# Altium PCB Copy of SafetyLightBoard.PcbDoc
Units mil, origin at the board's own origin, x right, y up, seen from the top; angles counter-clockwise.
Board outline 3600 x 3090 mil, 2 copper layers (Top Layer, Bottom Layer); 31 components, 27 nets, 118 pads, 20 vias.
Unrouted connection lines stored in the file: 2.
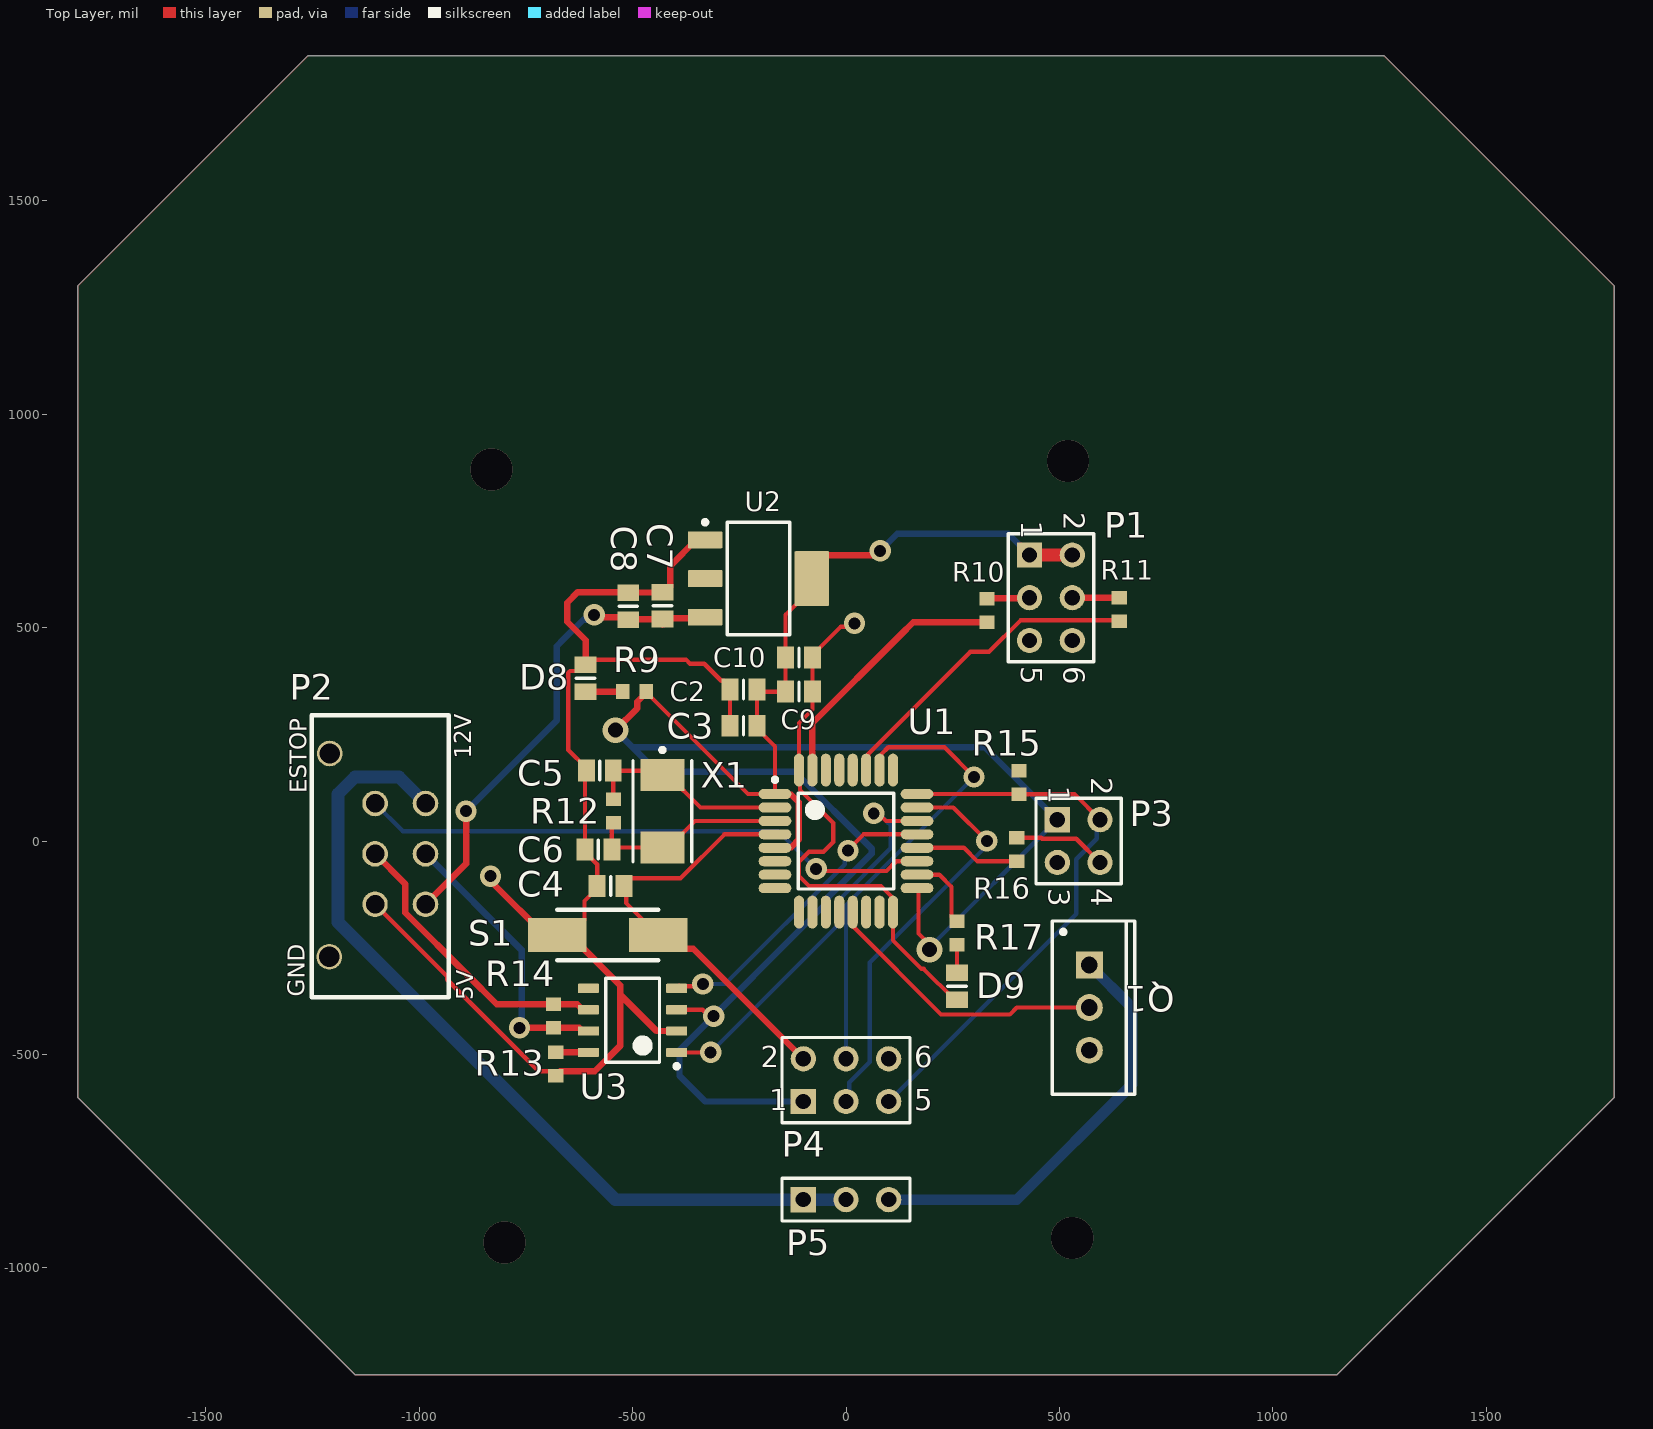
[diagram p0: Top Layer view]
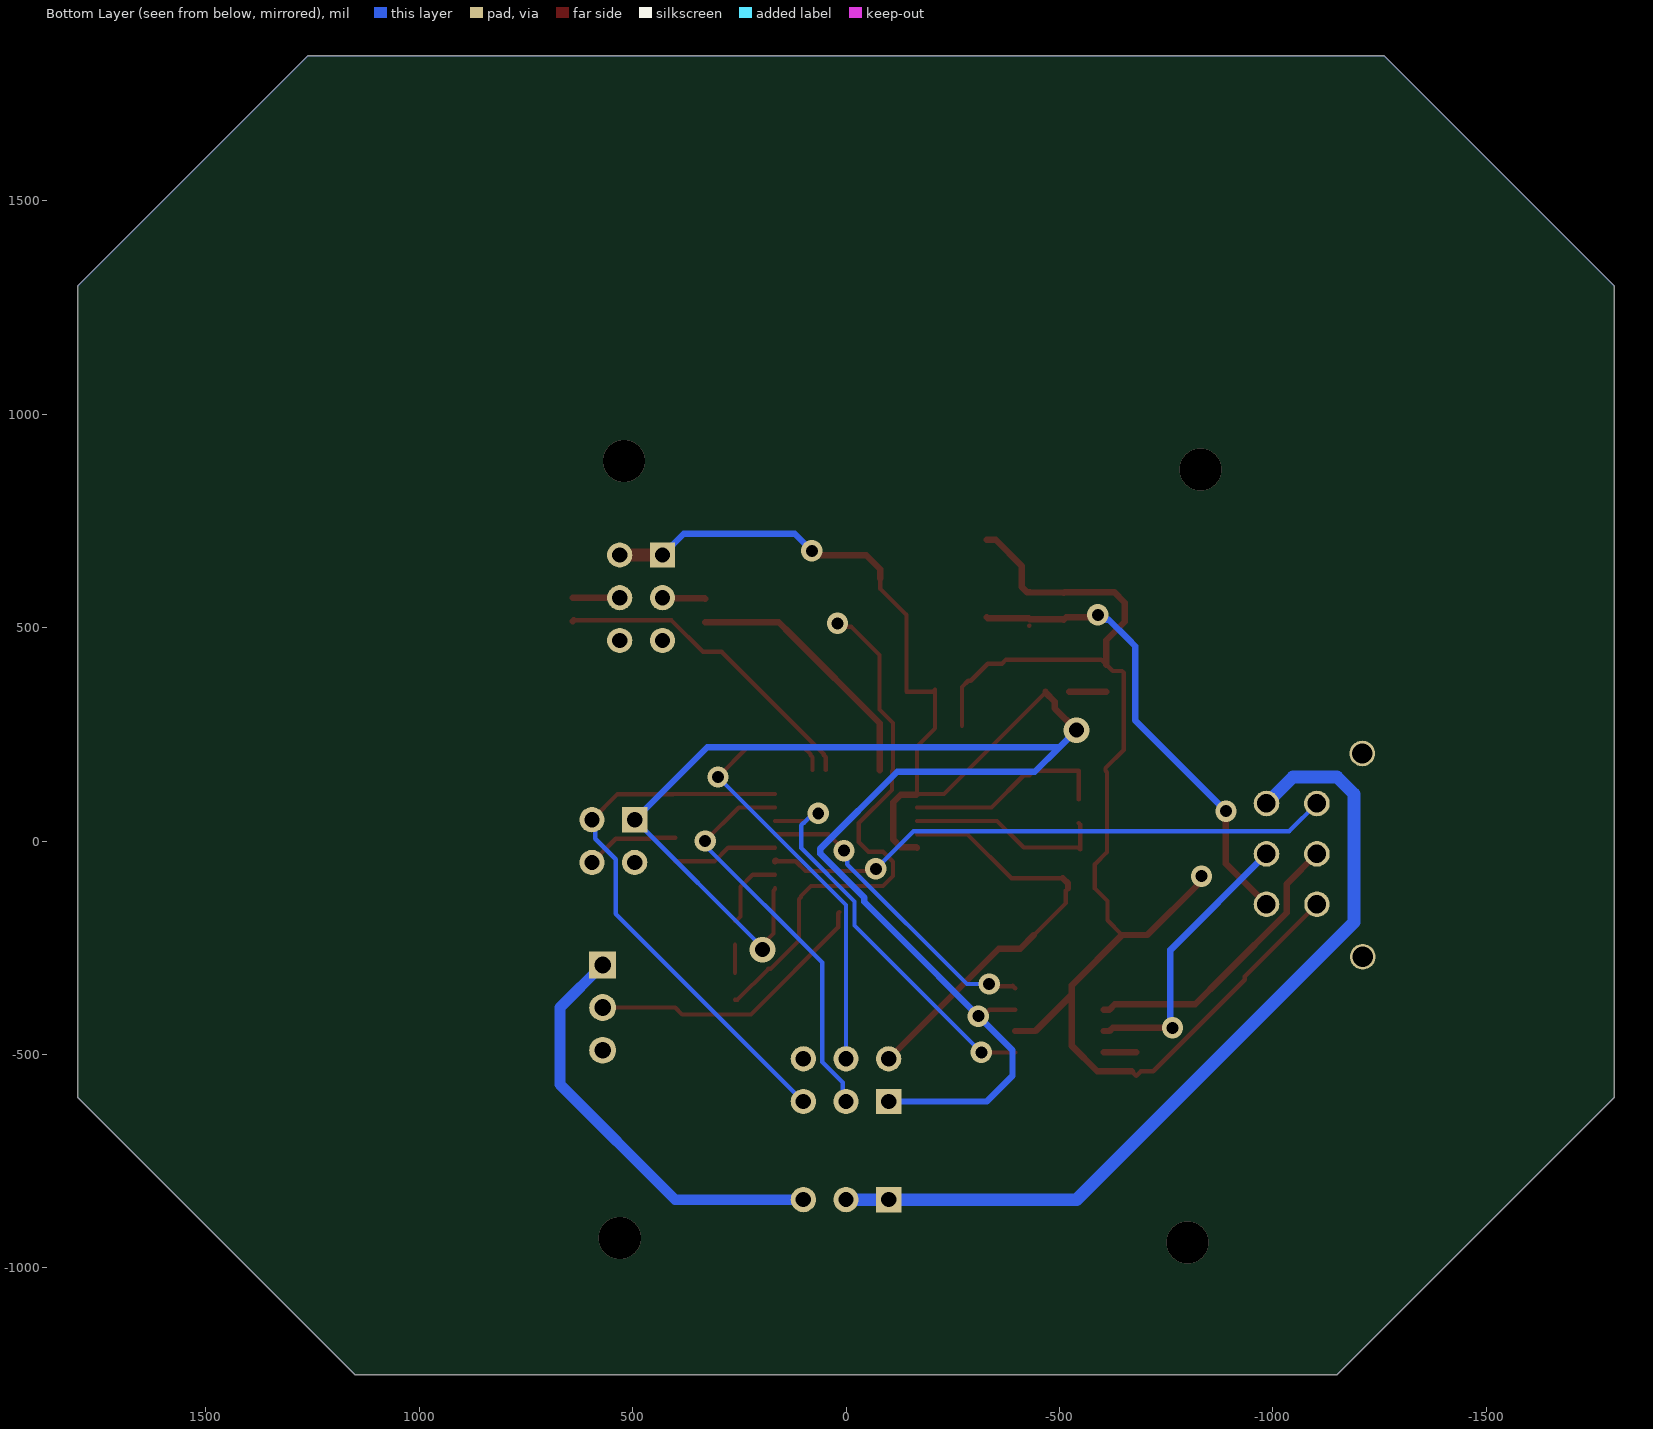
[diagram p1: Bottom Layer view, seen from below]

## Layer stack, top to bottom
Top Solder: solder mask 0.4, Solder Resist, Dk 3.5
Top Layer: signal copper 1.4
Dielectric 1: dielectric 12.6, FR-4, Dk 4.8
Bottom Layer: signal copper 1.4
Bottom Solder: solder mask 0.4, Solder Resist, Dk 3.5

## Board outline
-1150,-1250 1150,-1250 1800,-600 1800,1300 1260,1840 -1260,1840 -1800,1300 -1800,-600

## Design rules (kind name [scope] priority, off if disabled: settings)
Clearance [All] p1: gap=10 ignorepadtopadclearanceinfootprint=FALSE except(0: Arc-Hole Track-Hole SMDPad-Hole THPad-Hole Via-Hole Fill-Hole Poly-Hole Region-Hole Text-Hole)
PolygonConnect [All] p1: connectstyle=Relief reliefconductorwidth=10 reliefentries=4 polygonreliefangle="90 Angle" airgapwidth=10
RoutingVias [All] p1: holewidth=28 width=50 viastyle="Through Hole" minholewidth=28 minwidth=50 maxholewidth=28 maxwidth=50
SolderMaskExpansion [All] p1: expansion=4 istentingtop=FALSE
Width [All] p1: maxlimit=50 minlimit=10 preferedwidth=10 minimp=50.000000 maximp=50.000000 favimp=50.000000
30 further rules are at their usual default settings.

## Components (designator, comment, footprint, x,y, rotation, side; value= is the part's Value field where it differs from the comment)
C2 "Cap" 6-0805_L -240,355 r0 top value=100nF
C3 "Cap" 6-0805_L -240,270 r0 top value=100nF
C4 "Cap" 6-0805_L -551.5,-105 r0 top value=0.1UF
C5 "Cap" 6-0805_L -576.5,165 r180 top value=20pF
C6 "Cap" 6-0805_L -580,-20 r180 top value=20pF
C7 "Cap" 6-0805_L -430,551.5 r270 top value=100nF
C8 "Cap" 6-0805_L -510,550 r270 top value=100uF
C9 "Cap" 6-0805_L -110,350 r180 top value=330uF
C10 "Cap" 6-0805_L -110,430 r180 top value=100nF
D8 "LED1" 6-0805_L -610,381.5 r90 top
D9 "LED1" 6-0805_L 260,-340 r270 top
P1 "2x3 Header" HDR2X3 430,670 r270 top
P2 "2x3 Header" "Molex Connector" -1103.11,-148.11 r90 top
P3 "Header 2X2" HDR2X2 495,50 r270 top
P4 "MHDR2X3" HDR2X3 -100,-610 r0 top
P5 "Header 3H" HDR1X3 -100,-840 r0 top
Q1 "MOSFET-N" TO-262-AA 570,-390 r270 top
R9 "Res1" 1608[0603] -495,350 r180 top value=510
R10 "Res1" 1608[0603] 330,540 r270 top value=1K
R11 "Res1" 1608[0603] 640,542.56 r270 top value=1K
R12 "Res1" 1608[0603] -545,70 r270 top value=1M
R13 "Res1" 1608[0603] -680,-522.56 r90 top value=10K
R14 "Res1" 1608[0603] -685,-410 r270 top value=120
R15 "Res1" 1608[0603] 405,137.56 r90 top value=10k
R16 "Res1" 1608[0603] 400,-20 r270 top value=10k
R17 "Res1" 1608[0603] 260,-215 r270 top value=510
S1 "SW-PB" "Push Switch 3x6x2.5" -676.22,-220 r0 top
U1 "STM32F334K8T6" STM-LQFP32_M 0,0 r0 top
U2 "REG1117-3.3" DCY0004A_M -205,615 r0 top
U3 "SN65HVD230QDR" D0008A_L -500,-420 r180 top
X1 "ABM7-8.000MHZ-D2Y-T" ABRA-ABM7-2_V -430,69.65 r270 top

## Footprints (in the part's own frame and the unit in brackets; to place one, negate y for a bottom-side part, rotate by r counter-clockwise, add the part's x,y. Pads: shape width x height; smd on the part's side, far side on the other; paste and mask are expansions set on the pad)
6-0805_L [mm] "Chip Resistor, Body 2.0x1.2mm, IPC High Density"
  rect 1x1.3 smd: 1(-0.8,0) 2(0.8,0)
  silkscreen extent 0,-0.55 0,0.55, body extent -1.07,-0.7 1.07,0.7, height 0.7
1608[0603] [mm] "Chip Capacitor, Body 1.6x0.8mm, IPC High Density"
  rect 0.8x0.9 smd: 1(-0.7,0) 2(0.7,0)
  body extent -0.87,-0.48 0.87,0.48, height 1.3
ABRA-ABM7-2_V [mm] "SMD, 2-Leads, Body 6x3.5mm"
  rect 1.9x2.6 smd: 1(-2.15,0) 2(2.15,0)
  silkscreen extent -3.77,-1.75 3,1.75, body extent -3,-1.75 3,1.75, height 1.4
D0008A_L [mm] "SOIC, 8-Leads, Body 5x4mm, Pitch 1.27mm, IPC High Density"
  rrect18% 1.25x0.55 smd: 1(-2.625,1.905) 2(-2.625,0.635) 3(-2.625,-0.635) 4(-2.625,-1.905) 5(2.625,-1.905) 6(2.625,-0.635) 7(2.625,0.635) 8(2.625,1.905)
  silkscreen extent -2.75,-2.5 1.6,2.85, body extent -3,-2.45 3,2.45, height 1.63
DCY0004A_M [mm] "SOT223, 4-Leads, Body 6.7x3.7mm, Pitch 2.3mm, IPC Low Density"
  rrect10% 2.05x1 smd: 1(-3.175,2.3) 2(-3.175,0) 3(-3.175,-2.3)
  rrect5% 2.05x3.25 smd: 4(3.175,0)
  silkscreen extent -3.3,-3.35 1.85,3.47, body extent -3.5,-3.25 3.5,3.25, height 1.62
HDR1X3 [mm] "Connector; Header; 3 Position"
  rect 1.5x1.5 hole 0.9: 1(0,0)
  round 1.5 hole 0.9: 2(2.54,0) 3(5.08,0)
  silkscreen extent -1.27,-1.27 6.35,1.27
HDR2X2 [mm] "Connector; Header; 2x2 Position"
  rect 1.5x1.5 hole 0.9: 1(0,0)
  round 1.5 hole 0.9: 2(0,2.54) 3(2.54,0) 4(2.54,2.54)
  silkscreen extent -1.27,-1.27 3.81,3.81
HDR2X3 [mm] "Connector; Header; 3x2 Position"
  rect 1.5x1.5 hole 0.9: 1(0,0)
  round 1.5 hole 0.9: 2(0,2.54) 3(2.54,0) 4(2.54,2.54) 5(5.08,0) 6(5.08,2.54)
  silkscreen extent -1.27,-1.27 6.35,3.81
"Molex Connector" [mm]
  round 1.524 hole 1.1: 1(6,-3) 2(3,-3) 3(0,-3) 4(6,0) 5(3,0)
  oval 1.524x1.5 hole 1.1: 6(0,0)
  round 1.524 hole 1.2: ""(-3.125,2.725) ""(8.975,2.7)
  silkscreen extent -5.53,-4.39 11.25,3.78
"Push Switch 3x6x2.5" [mm]
  rect 3.5x2 smd: 1(0,0) 2(6,0)
  silkscreen extent 0,-1.5 6,1.5
STM-LQFP32_M [mm] "QFP, 32-Leads, Body 7x7mm, Pitch 0.8mm, IPC Low Density"
  oval 1.95x0.6 smd: 1(-4.225,2.8) 2(-4.225,2) 3(-4.225,1.2) 4(-4.225,0.4) 5(-4.225,-0.4) 6(-4.225,-1.2) 7(-4.225,-2) 8(-4.225,-2.8) 17(4.225,-2.8) 18(4.225,-2) 19(4.225,-1.2) 20(4.225,-0.4) 21(4.225,0.4) 22(4.225,1.2) 23(4.225,2) 24(4.225,2.8)
  oval 0.6x1.95 smd: 9(-2.8,-4.225) 10(-2,-4.225) 11(-1.2,-4.225) 12(-0.4,-4.225) 13(0.4,-4.225) 14(1.2,-4.225) 15(2,-4.225) 16(2.8,-4.225) 25(2.8,4.225) 26(2,4.225) 27(1.2,4.225) 28(0.4,4.225) 29(-0.4,4.225) 30(-1.2,4.225) 31(-2,4.225) 32(-2.8,4.225)
  silkscreen extent -4.35,-2.85 2.85,3.77, body extent -3.5,-3.5 3.5,3.5, height 1.6
TO-262-AA [mm] "TO, Thru-Hole, Vertical, Heatsink Mounted; 3 In-Line Leads; Pitch 2.54 mm"
  rect 1.6x1.6 hole 1: 1(-2.54,0)
  round 1.6 hole 1: 2(0,0) 3(2.54,0)
  silkscreen extent -5.15,-2.2 5.15,2.7, body extent -5.2,-2.25 5.2,2.75, height 19.7

## Part data
C2 C3 C4 C5 C6 C7 C8 C9 C10: "Capacitor", LatestRevisionDate=17-Jul-2002, LatestRevisionNote="Re-released for DXP Platform.", PackageDescription="Radial Cap, Thru-Hole; 2 Leads; 0.3 in Pin Spacing", PackageReference=RAD-0.3, Published=8-Jun-2000, Publisher="Altium Limited"
D8 D9: "Typical RED GaAs LED", LatestRevisionDate=08-Jul-2005, LatestRevisionNote="Mech Layer 1 removed.", PackageDescription="LED; 2 Leads", PackageReference=LED-1, Published=8-Jun-2000, Publisher="Altium Limited"
P3: "Header, 2-Pin, Dual row", LatestRevisionDate=17-Jul-2002, LatestRevisionNote="Re-released for DXP Platform.", Publisher="Altium Limited"
P4: "Header, 3-Pin, Dual row", LatestRevisionDate=17-Jul-2002, LatestRevisionNote="Re-released for DXP Platform.", Publisher="Altium Limited"
P5: "Header, 3-Pin, Right Angle", LatestRevisionDate=17-Jul-2002, LatestRevisionNote="Re-released for DXP Platform.", Publisher="Altium Limited"
Q1: "N-Channel MOSFET", Supplier Part Number 1=511-STB4NK60Z-1, LatestRevisionDate=17-Jul-2002, LatestRevisionNote="Re-released for DXP Platform.", PackageDescription="TO, Flat Index; 3 In-Line, Axial Leads; Body Dia. 4.6mm; Lead Dia. 0.5 mm (max)", PackageReference=E3, PackageVersion=1995/1996, Published=8-Jun-2000, Publisher="Altium Limited", Supplier 1=Mouser
R9 R10 R11 R12 R13 R14 R15 R16 R17: "Resistor", LatestRevisionDate=17-Jul-2002, LatestRevisionNote="Re-released for DXP Platform.", PackageDescription="Axial Device, Thru-Hole; 2 Leads; 0.3 in Pin Spacing", PackageReference=AXIAL-0.3, Published=8-Jun-2000, Publisher="Altium Limited"
S1: "Switch", LatestRevisionDate=17-Jul-2002, LatestRevisionNote="Re-released for DXP Platform.", PackageDescription="Switch; 2 Leads", PackageReference=SPST-2, Published=24-Mar-1999, Publisher="Altium Limited"
U1: library part CMP-0537-00074-1, "ARM Cortex-M4 32-bit MCU, 64 KB Flash, 16 KB Internal RAM, 25 I/Os, 32-Pin LQFP, -40 to 85 degC, Tray", I/Os (High Current)=25, Operating Frequency(F) (Processor speed) (MHz)=72, Package Description="32-Pin Low Profile Quad Flat Package, 7 x 7 mm Body, 0.8 mm Pitch", Package Reference=LQFP32, Supply Voltage(Vcc) min (V)=2, ComponentLink1Description="Manufacturer URL", ComponentLink1URL=http://www.st.com/, ComponentLink2Description=Datasheet, ComponentLink2URL=http://www.st.com/st-web-ui/static/active/en/resource/technical/document/datasheet/DM00097745.pdf, Core="ARM Cortex-M4", D/A Converter=3, DatasheetVersion="Rev. 4", FLASH Size (Prog) (kB)=64, Internal RAM Size (kB)=16, Mounting Technology="Surface Mount", Packing=Tray
U2: library part CMP-0395-00549-2, "Single Output LDO, 800 mA, Fixed 3.3 V Output, 3.8 to 15 V Input, with Internal Current Limiting, 4-pin SOT-223 (DCY), -40 to 125 degC, Green (RoHS & no Sb/Br)", Manufacturer="Texas Instruments", Rating=Catalog, Code_JEDEC=TO-261, ComponentLink1Description="Manufacturer URL", ComponentLink1URL=http://www.ti.com/, ComponentLink2Description=Datasheet, ComponentLink2URL=http://www.ti.com/general/docs/lit/getliterature.tsp?genericPartNumber=REG1117-33&fileType=pdf, ComponentLink3Description="Package Specification", ComponentLink3URL=http://www.ti.com/litv/pdf/mpds094a, DatasheetVersion=SBVS001D, Eco-Plan="Green (RoHS & no Sb/Br)", Fixed Output Options(V)=5, Iout(Max)(A)=0.8, Iq(Typ)(mA)=4, Mounting Technology="Surface Mount", PackageDescription="4-Pin Plastic Small Outline, Body 3.5 x 6.5 mm, Pitch 2.3 mm", PackageReference=DCY0004A, PackageVersion=4202506/B, PartNumber=REG1117-3.3, SubFamily="Single Channel LDO", Vdo(Typ)(mV)=1100, Vin(Max)(V)=15, Vin(Min)(V)=3.8, Vout Adj(Max)(V)=3.3, Vout Adj(Min)(V)=3.3
U3: library part CMP-0315-00033-2, "Automotive Catalog 3.3 V CAN Transceiver, 17 mA, 3.3 V, -40 to 125 degC, 8-pin SOIC (D), Green (RoHS & no Sb/Br)", Drivers Per Package=1, Manufacturer="Texas Instruments", Rating=Catalog, Supply Voltage(s)(V)=3.3, Code_JEDEC=MS-012AA, ComponentLink1Description=Datasheet, ComponentLink1URL=http://www.ti.com/lit/ds/symlink/sn65hvd230.pdf, DatasheetVersion=SLOS346K, Eco-Plan="Green (RoHS & no Sb/Br)", ICC(Max)(mA)=17, Isolated=No, Mounting Technology="Surface Mount", PackageDescription="8-Pin Plastic Small Outline Integrated Circuit, 4.9 x 3.9 mm, Pitch 1.27 mm Pitch", PackageReference=D0008A, PackageVersion="revM, Jun-2011", PartNumber=SN65HVD230QDR, Receivers Per Package=1, SubFamily=CAN, Transient Pulse Protection(V)="-25 to 25"
X1: library part CMP-2000-05034-1, "Microprocessor Crystal, 8 MHz, 18 PF, -40 to 85 degC, 2-Pin SMD, RoHS, Tape and Reel", ESR (Equivalent Series Resistance)=100Ohm, Frequency=8MHz, Frequency Stability=±30ppm, Frequency Tolerance=±20ppm, Load Capacitance=18pF, Manufacturer=Abracon, Operating Mode=Fundamental, Operating Temperature=-40degC~85degC, Package / Case=2-SMD, Package Description="2-Pin Surface Mount Device, Body 6 x 3.5 mm", Package Reference=ABM7, Standard Package=1,000, 3D Model="ABM7.pdf /  / ABM7.stp", Catalog Drawings="ABM7SeriesTop /  / ABM7SeriesSide /  / ABM7SeriesBottom", Category=CrystalsandOscillators, Datasheet URL=https://datasheet.ciiva.com/1357/1718755-1357277.pdf, Datasheet Version=Dec-17, Family=Crystals, Featured Product=ABM7andABM11Crystals, Height="0.055\"(1.40mm)", Manufacturer URL=http://www.abracon.com/, Mounting Type=SurfaceMount, Online Catalog=ABM7Series, Other Names="535-9831-2 / ABM7-8.000MHZ-D-2-Y-T / ABM78000MHZD2YT", Packaging=Tape&Reel(TR), RoHS Information=RoHS2/REACHCompliance, Series=ABM7, Size / Dimension="0.236\"Lx0.138\"W(6.00mmx3.50mm)", Type=MHzCrystal

## Via types
v1: diameter 50, hole 28, Top Layer to Bottom Layer, 14 vias
v2: diameter 98.5, hole 98.5, Top Layer to Bottom Layer, 4 vias
v3: diameter 60, hole 35, Top Layer to Bottom Layer, 2 vias

## Nets (pads, with @x,y where several pads share a name; then routed paths per layer and width w, separated by ;. In a path a pad name is that pad's centre, name@x,y a point inside that pad or via, vN(x,y) a via of type N, cw(c..) or ccw(c..) an arc to the next point about the centre after c; other vN are vias at no path point)
+5: C7.2 C8.2 P2.3 U2.3 | length 1118
  Top Layer w10: C7.2@-430,505 C7.2@-429.45,504.45
  Top Layer w15: P2.3 -890,-53.11 v1(-890,70) ; v1(-590,530) -584.25,524.25 -515.75,524.25 C8.2 -509.25,519.25 -430.75,519.25 C7.2 -427.78,522.22 -332.22,522.22 U2.3
  Bottom Layer w15: v1(-890,70) -677.5,282.5 -677.5,456.69 -660.44,473.75 -615.68,518.51 -610.96,518.51 -599.47,530 v1(-590,530)
+12: P2.1 P5.1 P5.2 | length 2006.4
  Bottom Layer w30: P2.1 -1046.89,150 -1150,150 -1190,110 -1190,-190 -540,-840 P5.1 P5.2
BOOT0: R10.2 U1.31 | length 616.5
  Top Layer w15: U1.31 -78.74,276.26 127.81,482.82 157.44,512.44 R10.2
BOOT1: R11.2 U1.27 | length 758.2
  Top Layer w10: U1.27 47.24,196.6 51.93,201.28 51.93,204.02 291.34,443.43 335,443.43 408.6,517.03 R11.2@637.97,517.03
  Top Layer w15: R11.2@637.97,517.03 R11.2
CAN_RX: U1.21 U3.4 | length 728.5
  Top Layer w10: U3.4 -390.83,-339.17 -390.09,-339.91 -340.38,-339.91 v1(-335.29,-334.82) ; v1(4.7,-22.32) 4.7,-20.37 40.82,15.75 U1.21
  Bottom Layer w10: v1(-335.29,-334.82) -283.25,-334.82 -2.95,-54.52 -2.95,-29.98 v1(4.7,-22.32)
CAN_TX: U1.22 U3.1 | length 971.1
  Top Layer w10: U3.1 v1(-317.05,-495) ; v1(65,65) 75.82,65 93.58,47.24 U1.22
  Bottom Layer w10: v1@-335,-495 -327.5,-487.5 -324.55,-487.5 v1(-317.05,-495) -20,-197.95 -20,-141.48 105,-16.48 105,37.35 99.14,43.2 97.62,43.2 75.82,65 v1(65,65)
CANH: P2.2 R14.2 U3.7 | length 665.5
  Top Layer w15: v1(-765,-437.44) -764.94,-437.5 -685.06,-437.5 R14.2 -624.57,-437.56 -617.13,-445 U3.7
  Bottom Layer w15: P2.2 -760,-255 v1@-760,-437.5
CANL: P2.5 R14.1 U3.6 | length 690.3
  Top Layer w15: P2.5 -1032.5,-100.61 -1032.5,-167.79 -885.29,-315 -817.84,-382.44 R14.1 -629.68,-382.44 -617.13,-395 U3.6
ESTOP_SIG: P2.4 U1.19 | length 1346.7
  Top Layer w10: v1(-70,-65) -65,-70 95,-70 117.76,-47.24 U1.19
  Top Layer w15: U1.19@164.69,-45.59 U1.19
  Bottom Layer w10: P2.4 -1038.1,23.1 -753.1,23.1 -158.1,23.1 v1(-70,-65)
GND: C2.1 C3.1 C4.1 C5.2 C6.2 C7.1 C8.1 C9.1 C10.1 D8.2 D9.2 P1.5 P1.6 P2.6 P3.4 P4.6 Q1.3 R13.1 R16.1 S1.1 U1.16 U1.32 U2.1 U3.2 | length 4771.8
  Top Layer w10: P2.6 -934.21,-317.01 -934.21,-324.8 -719.64,-539.37 -690.75,-539.37 R13.1 R13.1@-669.25,-539.37 ; S1.1@-646.69,-220 -612.32,-185.63 -612.32,-140.24 -582.99,-110.91 C4.1 -582.99,-54.41 -611.5,-25.91 C6.2 -611.5,161.5 C5.2 -607.99,170.91 -650.59,213.5 -650.59,394.14 -646.43,398.31 -624.69,398.31 D8.2 -597.99,425 -375,425 -365.43,415.43 -331.93,415.43 -292.09,375.59 -286.18,375.59 -271.5,360.91 C2.1 C3.1 ; v1(20,510) 12.35,502.35 -12.06,502.35 -78.5,435.91 C10.1 C9.1 -78.5,308.32 -110.24,276.58 U1.32 -107.63,163.73 -107.63,119.88 -30,42.25 -30,-2.43 -52.57,-25 -86.57,-25 -110,-48.43 -110,-81.57 -86.46,-105.11 82.01,-105.11 105.55,-128.66 105.55,-131.39 110.24,-136.08 110.24,-232.54 177.03,-299.33 181.93,-299.33 254.09,-371.5 D9.2 ; R16.1 457.17,7.56 459.26,5.47 539.53,5.47 P3.4
  Top Layer w15: v1(-832.73,-82.27) -826.04,-88.96 -826.04,-99.71 -705.75,-220 S1.1 -646.69,-220 -529.29,-337.4 -529.29,-359.47 ; R13.1@-669.25,-539.37 -588.68,-539.37 -529.29,-479.99 -529.29,-359.47 ; D8.2 -610,470.14 -653.3,513.44 -653.3,558.4 -628.4,583.3 -511.8,583.3 C8.1 -509.25,582.24 -430.75,582.24 C7.1 -424.09,582.99 -411.91,595.18 -411.91,644.31 -350.67,705.55 U2.1 ; U3.2 -443.76,-445 -529.29,-359.47
NetC5_1: C5.1 R12.1 U1.2 X1.1 | length 481.8
  Top Layer w10: R12.1 C5.1 -440.71,165 X1.1 -416.22,154.29 -340.67,78.74 U1.2
NetC6_1: C6.1 R12.2 U1.3 X1.2 | length 473.9
  Top Layer w10: R12.2 -548.5,38.94 C6.1 -543.5,-15 X1.2 -416.22,-15 -353.98,47.24 U1.3
NetD8_1: D8.1 R9.2 | length 87.4
  Top Layer w15: D8.1 R9.2
NetD9_1: D9.1 R17.2 | length 65.9
  Top Layer w10: D9.1 R17.2
NetP1_3: P1.3 R10.1 | length 101
  Top Layer w15: R10.1 331.22,568.78 428.78,568.78 P1.3
NetP1_4: P1.4 R11.1 | length 110
  Top Layer w15: P1.4 530.06,570.06 639.94,570.06 R11.1
NetP5_3: P5.3 Q1.1 | length 1003.3
  Bottom Layer w25: P5.3 400,-840 670,-570 670,-390 Q1.1
NetR13_2: R13.2 U3.8 | length 76.7
  Top Layer w15: R13.2 U3.8
NRST: C4.2 P4.2 S1.2 U1.4 | length 1015.4
  Top Layer w10: C4.2@-520,-110.91 -515,-115.91 -515,-145 S1.2 ; C4.2@-507.81,-86.91 -387.66,-86.91 -285,15.75 U1.4
  Top Layer w15: C4.2@-520,-110.91 C4.2 -520,-99.09 C4.2@-507.81,-86.91 ; S1.2 -408.13,-251.87 -358.13,-251.87 P4.2
PA8: R17.1 U1.18 | length 179.3
  Top Layer w10: U1.18 218.74,-78.74 247.28,-107.28 247.28,-176.69 258.03,-187.44 R17.1
PA10: P3.3 R16.2 U1.20 | length 246.8
  Top Layer w10: U1.20 276.04,-15.75 307.85,-47.56 R16.2
PA13: P4.3 U1.23 | length 943
  Top Layer w10: U1.23 251.26,78.74 v1(330,0)
  Bottom Layer w10: P4.3 7.5,-602.5 7.5,-565.47 55.47,-517.5 55.47,-284.53 330,-10 v1(330,0)
PA14: P3.2 P4.5 R15.1 U1.24 | length 1318.6
  Top Layer w10: U1.24 404.76,110.24 R15.1 535,110 P3.2
  Bottom Layer w10: P4.5 539.53,-170.47 539.53,-42.5 587.5,5.47 587.5,42.5 P3.2
PA15: U1.25
PB3: P4.4 U1.26 | length 1076
  Top Layer w10: U1.26 78.74,196.6 83.43,201.28 83.43,204.02 99.13,219.72 230.51,219.72 v1(300,150.24)
  Bottom Layer w10: P4.4 0,-149.76 v1(300,150.24)
PB7: Q1.2 U1.13 U1.30 | length 679.6
  Top Layer w10: U1.13 18.35,-168.95 18.35,-201.94 222.6,-406.18 383.84,-406.18 400.02,-390 Q1.2
VCC: C2.2 C3.2 C9.2 C10.2 P1.1 P1.2 P3.1 P4.1 R9.1 R15.2 U1.1 U1.5 U1.17 U2.2 U2.4 U3.3 | length 5561.3
  Top Layer w10: R9.1@-467.44,348.03 -229.65,110.24 U1.1 -166.34,221.93 -208.5,264.09 C3.2 C2.2 -203.5,350 C9.2 C10.2 -141.5,529.88 -80,591.38 U2.4@-80,610.35 ; U3.3 -335.82,-395 -320.82,-410 v1(-310,-410) ; U1.17 166.34,-112.87 170,-116.53 170,-216.36 195.67,-242.03 v3(195.67,-254.33)
  Top Layer w15: v3(-540,260) -489.31,310.69 -489.31,326.16 -467.44,348.03 R9.1 ; U1.5 -164.69,-14.1 -128.16,-14.1 -110.45,3.61 -110.45,90.88 -128.16,108.59 -164.69,108.59 U1.1 ; U2.4 -80,636.6 -47.15,669.46 59.99,669.46 70.53,680 v1(80,680) ; P1.1@407.97,692.03 P1.1
  Top Layer w30: P1.1 P1.2
  Bottom Layer w10: v3(195.67,-254.33) 195.67,-249.33 P3.1
  Bottom Layer w15: v3(-540,260) -500,220 ; P4.1 -330,-610 -390,-550 -390,-490 -42.5,-142.5 -42.5,-132.16 59.86,-29.8 59.86,-17.38 -120,162.48 -442.48,162.48 -500,220 ; v1(80,680) 120,720 380,720 P1.1 ; P3.1 325,220 -500,220
pads on no net: P2. U1.6 U1.7 U1.8 U1.9 U1.10 U1.11 U1.12 U1.14 U1.15 U1.28 U1.29 U3.5
copper on no net:
  other v2: -800,-940 530,-930 -830,870 520,890

## Polygon pours and split planes (outlines as drawn)
GND on Bottom Layer "NONET_L02_P005" (solid, shelved, pour order 5): -1150,-1250 1150,-1250 1800,-600 1800,1300 1260,1840 -1260,1840 -1800,1300 -1800,-600
VCC on Top Layer "NONET_L01_P006" (solid, shelved, pour order 6): -1150,-1250 1150,-1250 1800,-600 1800,1300 1260,1840 -1260,1840 -1800,1300 -1800,-600

## Text inside footprints (layer, text, board x,y; h text height)
P1: Top Overlay "1" at 410,750 h50 r270; Top Overlay "2" at 510,770 h50 r270; Top Overlay "5" at 410,410 h50 r270; Top Overlay "6" at 510,410 h50 r270
P2: Top Overlay "ESTOP" at -1263.54,111.73 h39.37 r90; Top Overlay "GND" at -1267.48,-364.65 h39.37 r90; Top Overlay "5V" at -872.8,-372.52 h39.37 r90; Top Overlay "12V" at -877.72,192.44 h39.37 r90
P3: Top Overlay "1" at 475,130 h50 r270; Top Overlay "2" at 575,150 h50 r270; Top Overlay "4" at 575,-110 h50 r270; Top Overlay "3" at 475,-110 h50 r270
P4: Top Overlay "6" at 160,-530 h50; Top Overlay "5" at 160,-630 h50; Top Overlay "2" at -200,-530 h50; Top Overlay "1" at -180,-630 h50